# Altium PCB High-voltage.PcbDoc (part 1 of 2)
Units mil, origin at the board's own origin, x right, y up, seen from the top; angles counter-clockwise.
Board outline 11023.62 x 6692.91 mil, 2 copper layers (Top Layer, Bottom Layer); 241 components, 97 nets, 501 pads, 433 vias.
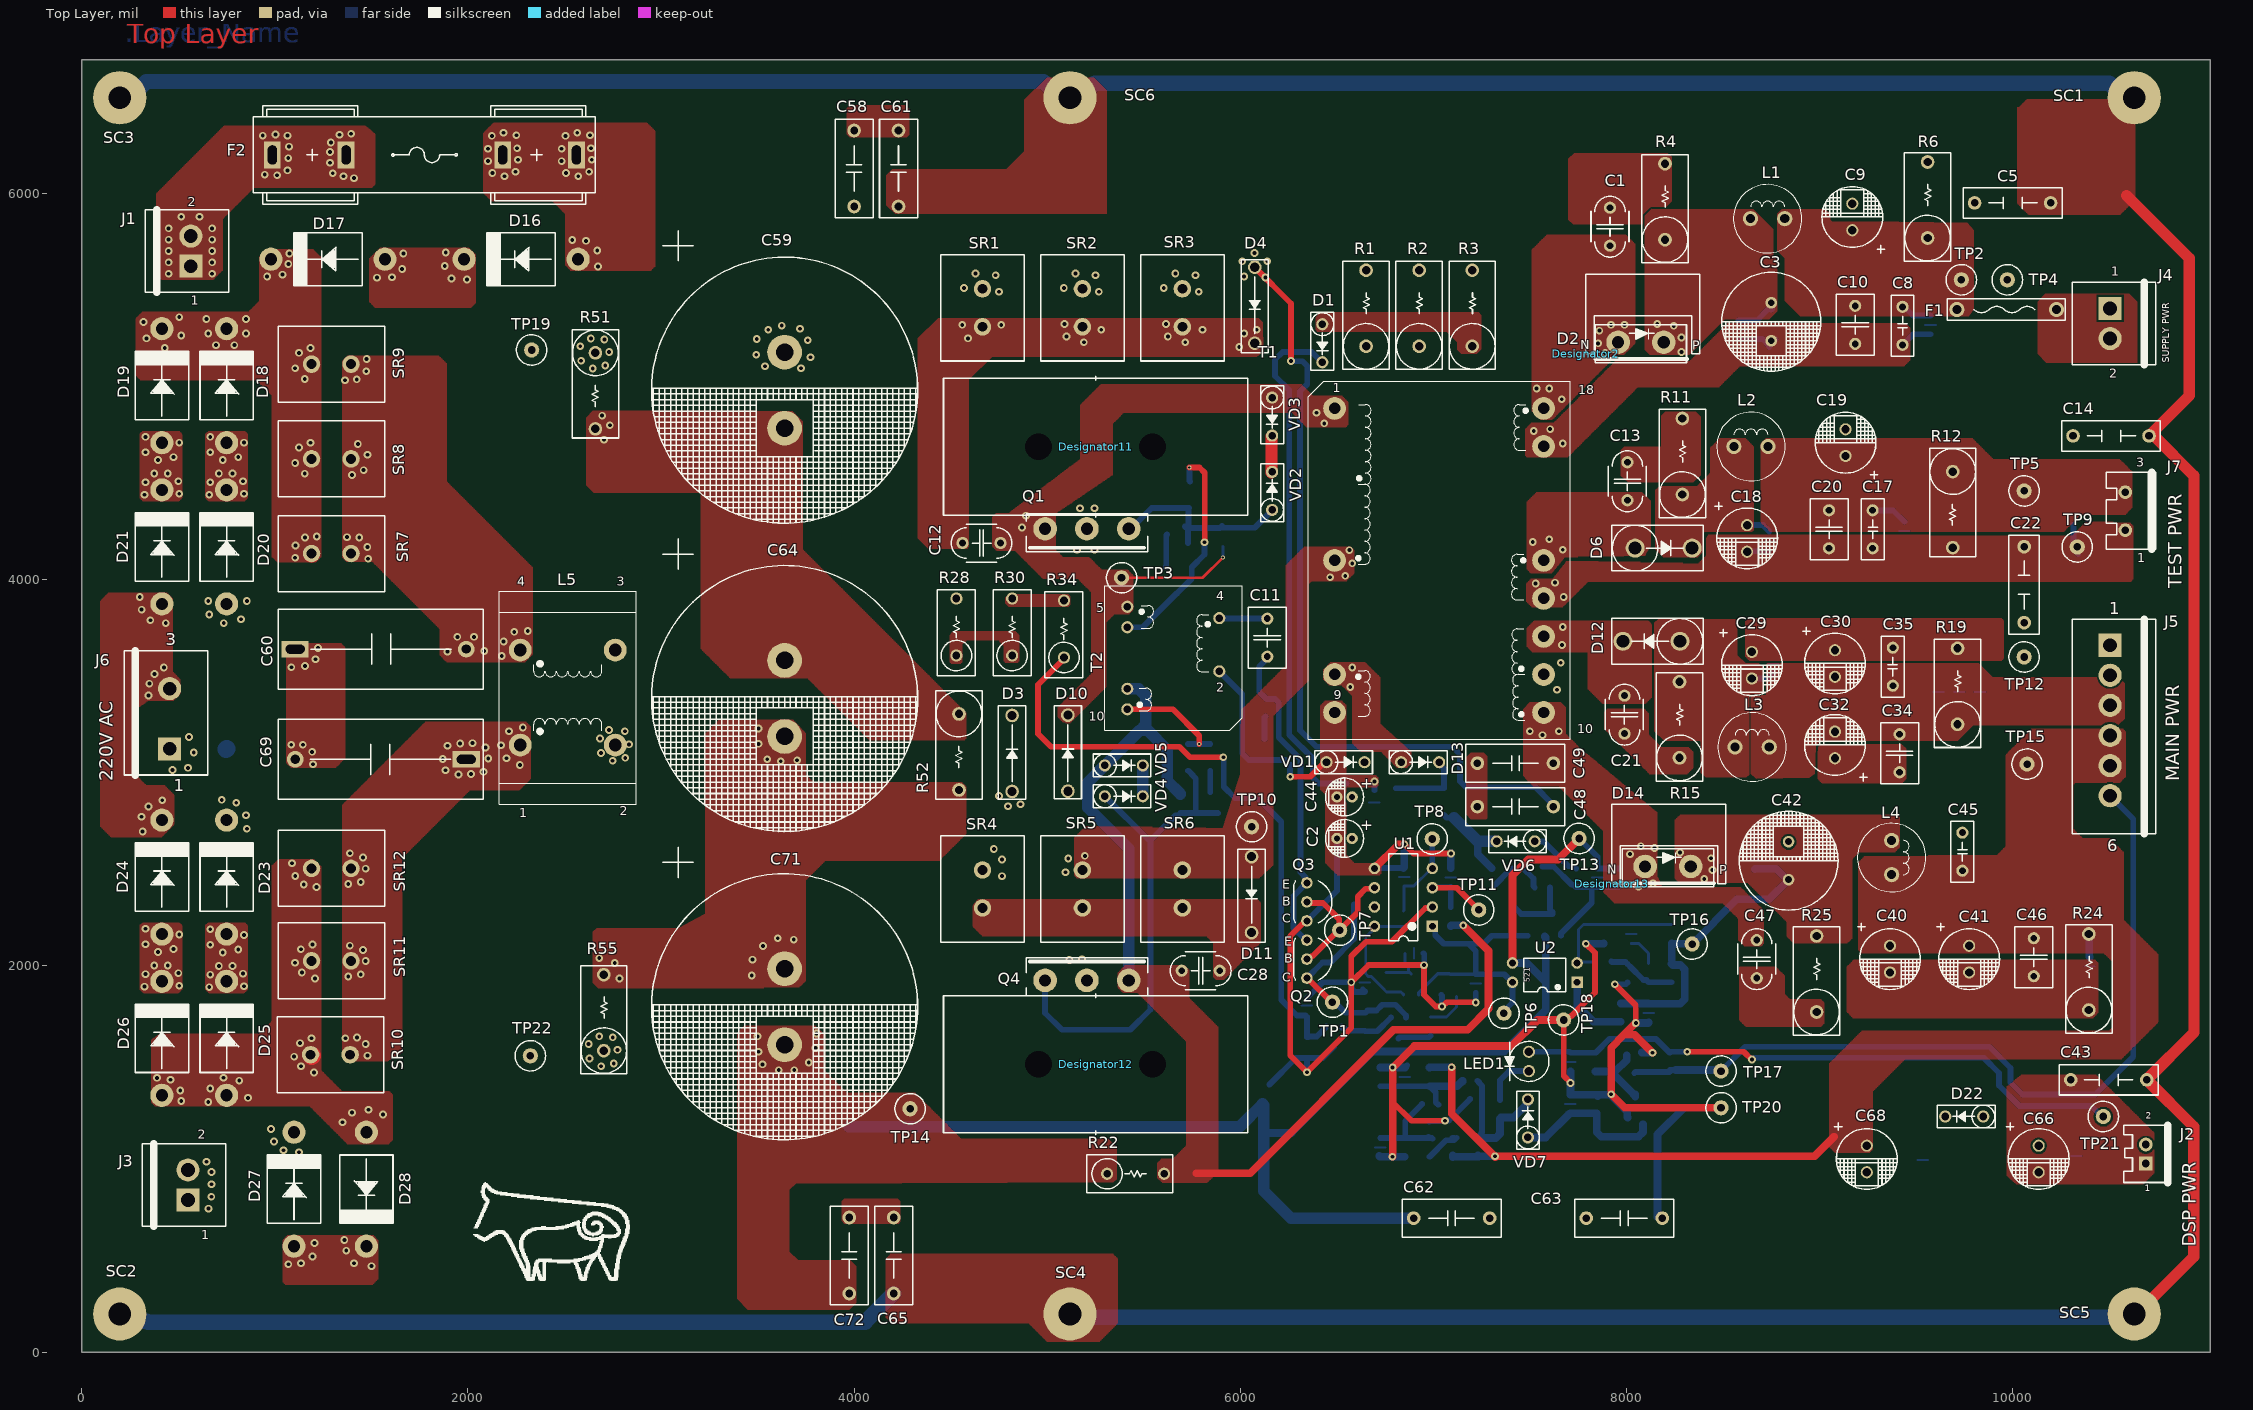
[diagram p0: Top Layer view]
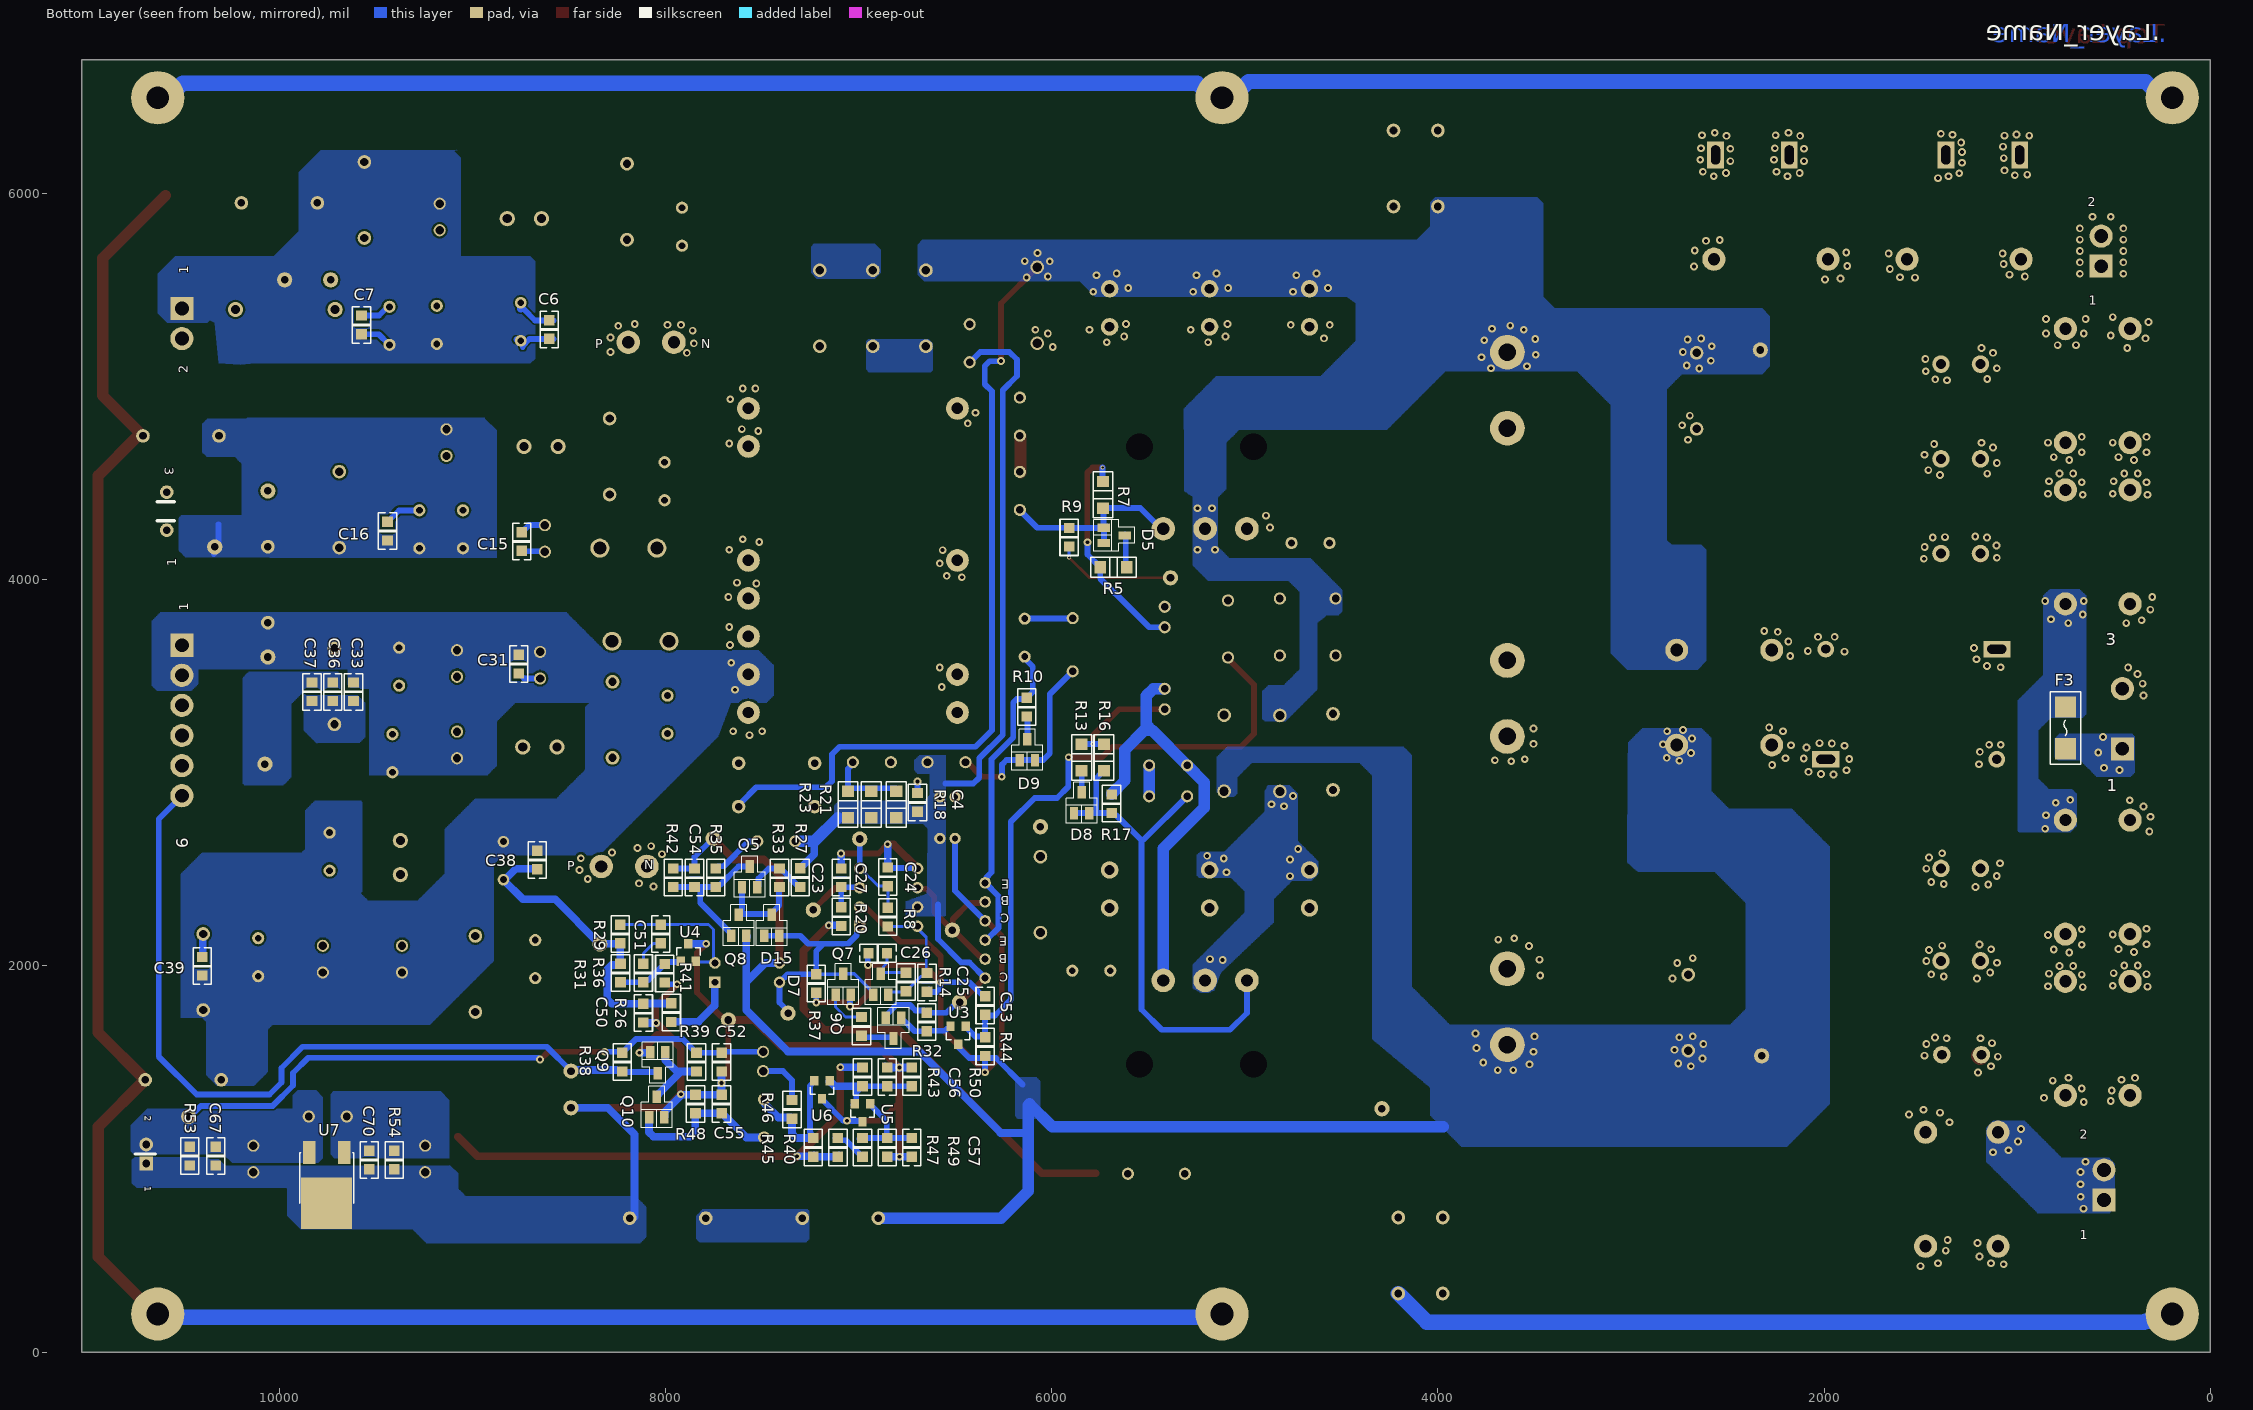
[diagram p1: Bottom Layer view, seen from below]

## Layer stack, top to bottom
Top Solder: solder mask 0.4, Solder Resist, Dk 3.5
Top Layer: signal copper 1.4
Dielectric 1: dielectric 12.6, FR-4, Dk 4.8
Bottom Layer: signal copper 1.4
Bottom Solder: solder mask 0.4, Solder Resist, Dk 3.5

## Board outline
0,0 11023.62,0 11023.62,6692.91 0,6692.91

## Design rules (kind name [scope] priority, off if disabled: settings)
Clearance [All] p1: gap=10 ignorepadtopadclearanceinfootprint=FALSE except(0: Arc-Hole Track-Hole SMDPad-Hole THPad-Hole Via-Hole Fill-Hole Poly-Hole Region-Hole Text-Hole)
PlaneConnect [All] p1: planeconnectstyle=Direct reliefexpansion=20 reliefentries=4 reliefconductorwidth=10 reliefairgap=10
PolygonConnect [All] p1: connectstyle=Direct reliefconductorwidth=10 reliefentries=4 polygonreliefangle="90 Angle" airgapwidth=10
RoutingVias [All] p1: holewidth=12 width=24 viastyle="Through Hole" minholewidth=12 minwidth=20 maxholewidth=20 maxwidth=40
SolderMaskExpansion [All] p1: expansion=4 istentingtop=FALSE
Width [All] p1: maxlimit=300 minlimit=8 preferedwidth=10
29 further rules are at their usual default settings.

## Classes and differential pairs
net class PWR: GND GND+12V GND+15V VCC+5V VCC+12V VCC+15V VCC+18V VCC-15V VDC

## Components (designator, comment, footprint, x,y, rotation, side; value= is the part's Value field where it differs from the comment)
C1 "102K/1KV" CC509*5 7915,5828.43 r90 top
C2 "47uF/25V" CE2050 6540,2660 r270 top
C3 "1000uF/35V" CE50130 8750.31,5336.18 r0 top
C4 "104/0805" C0805BSM 6695,2846.77 r270 bottom
C5 "222/250VAC(Y2)" C10013*4 10000.23,5951.8 r0 top
C6 "104/0805" C0805BSM 8602.48,5296.33 r90 bottom
C7 "104/0805" C0805BSM 9575,5320 r90 bottom
C8 "223K/63VDC" C508*3 9430,5315 r270 top
C9 "470uF/25V" CE3580 9170,5878.9 r180 top
C10 "105K63VDC" C508*5 9185,5320 r270 top
C11 "105K/63VDC" C508*5 6140,3700 r270 top
C12 "102K/1KV" CC509*5 4660,4190 r180 top
C13 "102K/1KV" CC509*5 8005,4510 r90 top
C14 "NC" C10013*4 10510,4745 r0 top
C15 "104/0805" C0805BSM 8745,4198.23 r90 bottom
C16 "104/0805" C0805BSM 9440,4251.77 r90 bottom
C17 "223K/63VDC" C508*3 9275.29,4261.22 r270 top
C18 "470uF/25V" CE3580 8625,4213.9 r0 top
C19 "470uF/25V" CE3580 9135,4710 r180 top
C20 "105K/63VDC" C508*5 9049.34,4261.22 r270 top
C21 "102K/1KV" CC509*5 7990,3301.2 r270 top
C22 "NC" C10013*4 10060,3974.48 r270 top
C23 "104/0805" C0805BSM 7219.39,1908.88 r90 bottom
C24 "222/0805" C0805BSM 6848.98,2461.11 r90 bottom
C25 "104/0805" C0805BSM 6645.78,1914.88 r90 bottom
C26 "225/0805" C0805BSM 6900.89,2065 r180 bottom
C27 "471/0805" C0805BSM 7090,2456.77 r90 bottom
C28 "102K/1KV" CC509*5 5795,1975 r0 top
C29 "470uF/25V" CE3580 8650,3557.3 r0 top
C30 "470uF/25V" CE3580 9080,3566.2 r0 top
C31 "104/0805" C0805BSM 8760,3562.97 r270 bottom
C32 "470uF/25V" CE3580 9080,3144.43 r180 top
C33 "104/0805" C0805BSM 9616.39,3419.63 r270 bottom
C34 "105K/63VDC" C508*5 9415,3101.2 r270 top
C35 "223K/63VDC" C508*3 9380,3549.63 r90 top
C36 "105/0805" C0805BSM 9723.89,3419.63 r270 bottom
C37 "105/0805" C0805BSM 9831.39,3419.63 r270 bottom
C38 "104/0805" C0805BSM 8665,2548.23 r90 bottom
C39 "104/0805" C0805BSM 10400,1998.23 r270 bottom
C40 "470uF/25V" CE3580 9365,2035 r0 top
C41 "470uF/25V" CE3580 9775,2035 r0 top
C42 "1000uF/35V" CE50130 8840,2545 r180 top
C43 "222/250VAC(Y2)" C10013*4 10498.15,1410 r180 top
C44 "47uF/25V" CE2050 6540,2875 r270 top
C45 "223K/63VDC" C508*3 9740,2591.57 r270 top
C46 "105K/63VDC" C508*5 10110,2045 r90 top
C47 "102K/1KV" CC509*5 8675,2035 r270 top
C48 "472M/400VAC(Y1)" C10013*5 7425,2825 r180 top
C49 "472M/400VAC(Y1)" C10013*5 7425,3050 r0 top
C50 "104/0805" C0805BSM 8115,1755 r90 bottom
C51 "225/0805" C0805BSM 8025,2165 r90 bottom
C52 "104/0805" C0805BSM 7710,1501.77 r270 bottom
C53 "104/0805" C0805BSM 6345,1795 r270 bottom
C54 "104/0805" C0805BSM 7850,2456.77 r270 bottom
C55 "104/0805" C0805BSM 7710,1284.8 r270 bottom
C56 "104/0805" C0805BSM 6852.5,1425 r270 bottom
C57 "104/0805" C0805BSM 6725,1060 r90 bottom
C58 "472M/400VAC(Y1)" C10013*5 4000,6130 r90 top
C59 "470uF/450V" CE100350 3640,4981.85 r0 top
C60 "0.47uF/330V~(X1)" C22527*9 1548.27,3640.5 r180 top
C61 "472M/400VAC(Y1)" C10013*5 4230,6130 r270 top
C62 "472M/400VAC(Y1)" C10013*5 7095,693.43 r0 top
C63 "472M/400VAC(Y1)" C10013*5 7988.88,693.43 r0 top
C64 "470uF/450V" CE100350 3640,3385 r0 top
C65 "472M/400VAC(Y1)" C10013*5 4205,500 r90 top
C66 "470uF/25V" CE3580 10135,1000 r0 top
C67 "104/0805" C0805BSM 10330,1015 r90 bottom
C68 "470uF/25V" CE3580 9245,1000 r0 top
C69 "0.47uF/330V~(X1)" C22527*9 1548.27,3070 r0 top
C70 "104/0805" C0805BSM 9535,995 r90 bottom
C71 "470uF/450V" CE100350 3640,1788.15 r0 top
C72 "472M/400VAC(Y1)" C10013*5 3975,500 r270 top
D1 "MUR2100E" D41P2H-1 6425,5215 r90 top
D2 "APT15D60BG" D247P2 8075,5230 r180 top
D3 "SF1600" D4236P2 4818.46,3297.13 r270 top
D4 "MUR2100E" D4236P2 6075,5225 r90 top
D5 "BAV70LT1G" TRNPNBSM 5675.87,4229.37 r0 bottom
D6 "MUR460" D27P2H-1 8192.65,4163.8 r180 top
D7 "BAT54S" TRNPNBSM 6885.63,1904.13 r270 bottom
D8 "BAV70LT1G" TRNPNBSM 5845,2845 r270 bottom
D9 "BAV70LT1G" TRNPNBSM 6126.26,3120 r270 bottom
D10 "SF1600" D4236P2 5106.93,3298.46 r270 top
D11 "MUR2100E" D4236P2 6058.58,2172.05 r90 top
D12 "MUR460" D27P2H-1 8129.65,3681.2 r0 top
D13 "MUR2100E" D41P2H-1 6941.42,3055 r180 top
D14 "APT15D60BG" D247P2 8215,2515 r180 top
D15 "BAV70LT1G" TRNPNBSM 7450,2210 r270 bottom
D16 "MUR4100E" D150 2275,5660 r0 top
D17 "MUR4100E" D150 1275,5660 r0 top
D18 "MUR4100E" D150 750,5005 r270 top
D19 "MUR4100E" D150 415,5005 r270 top
D20 "MUR4100E" D150 750,4170 r270 top
D21 "MUR4100E" D150 415,4170 r270 top
D22 "MUR2100E" D41P2H-1 9740,1220 r0 top
D23 "MUR4100E" D150 750,2460 r270 top
D24 "MUR4100E" D150 415,2460 r270 top
D25 "MUR4100E" D150 750,1625 r270 top
D26 "MUR4100E" D150 415,1625 r270 top
D27 "MUR4100E" D150 1099.06,843.37 r270 top
D28 "MUR4100E" D150 1474.06,843.37 r90 top
Designator2 "Comment" HS15*10.5 7790,5170 r0 top
Designator11 "Comment" HS18*40 5250.39,4688.98 r0 top
Designator12 "Comment" HS18*40 5250.39,1490.87 r180 top
Designator13 "Comment" HS15*10.5 7925,2425 r0 top
F1 "3A125V" "Fuse 3A 125V" 9711.31,5399.31 r0 top
F2 "=Value" F3A1000VP4 1774.49,6200 r180 top
F3 "6A/250Vac" FUSE5A350VAC 750,3124.09 r90 bottom
J1 "CON2/3.96" SIP-B1P2H 565,5624.09 r90 top
J2 "CON2/2.54" SIP-B1P2 10690,976.57 r90 top
J3 "CON2/3.96" SIP-B1P2H 550,787.05 r90 top
J4 "CON2/3.96" SIP-B1P2H 10505,5405 r270 top
J5 "CON6/3.96" SIP-B1P6H 10505,3660.91 r270 top
J6 "CON3/3.96" SIP-B1P3H 455,3124.09 r90 top
J7 "CON3/2.54" SIP-C3P3H 10583.74,4256.57 r90 top
L1 "DR2W-9*12  33uH" L9P2 8731.42,5870 r0 top
L2 "DR2W-9*12  33uH" L9P2 8645,4690 r0 top
L3 "DR2W-9*12  33uH" L9P2 8651.06,3133.6 r0 top
L4 "DR2W-9*12  33uH" L9P2 9373.86,2561.1 r270 top
L5 "T22*4" L28*17.5P4 2516.97,3389.36 r90 top
LED1 "发光二极管Φ5 发绿光" LED25C 7495,1505 r0 top
Q1 "2SK2613" 2SK2613 5205.66,4263.98 r180 top
Q2 "2N4401" 2N4401 6345,2035 r0 top
Q3 "2N4403" 2N4403 6345,2331.58 r0 top
Q4 "2SK2613" 2SK2613 5205.66,1925 r0 top
Q5 "MMBT2907ALT1" TRPNPBSM 7564.74,2460.67 r270 bottom
Q6 "NC" TRPNPBSM 6819.7,1678.05 r90 bottom
Q7 "NC" TRNPNBSM 7080,1904.13 r270 bottom
Q8 "MMBT2222ALT1G" TRNPNBSM 7621.08,2210.61 r270 bottom
Q9 "MMBT2222ALT1G" TRNPNBSM 8040.84,1498.97 r90 bottom
Q10 "MMBT2222ALT1G" TRNPNBSM 8045.63,1269.13 r270 bottom
R1 "100K/3W" R100060 6651.62,5602.83 r270 top
R2 "100K/3W" R100060 6926.62,5602.83 r270 top
R3 "100K/3W" R100060 7201.62,5602.83 r270 top
R4 "33/3W" R100060 8200,6155 r270 top
R5 "75/1206" R1206NSM 5680,4065 r180 bottom
R6 "1K/3W" R100060 9560,6163.7 r270 top
R7 "75/1206" R1206NSM 5735,4440 r270 bottom
R8 "6.81K/0805" R0805BSM 6848.98,2252.57 r90 bottom
R9 "49.9K/0805" R0805BSM 5910,4220 r270 bottom
R10 "1K/0805" R0805BSM 6130,3340 r270 bottom
R11 "33/3W" R100060 8290,4835 r270 top
R12 "1K/3W" R100060 9690,4166.3 r90 top
R13 "75/1206" R1206NSM 5845,3080 r270 bottom
R14 "1M/0805" R0805BSM 6755,1916.77 r270 bottom
R15 "33/3W" R100060 8275,3471.2 r270 top
R16 "75/1206" R1206NSM 5730,3080 r270 bottom
R17 "49.9K/0805" R0805BSM 5690,2840 r90 bottom
R18 "49.9/1206" R1206NSM 6805,2836.1 r90 bottom
R19 "1K/3W" R100060 9715,3644.9 r270 top
R20 "330/0805" R0805BSM 7090,2255 r270 bottom
R21 "249/1206" R1206NSM 6935,2836.1 r90 bottom
R22 "0.33/3W" R075005 5457.95,923.43 r180 top
R23 "75/1206" R1206NSM 7055,2836.1 r90 bottom
R24 "1K/3W" R100060 10395,2165 r270 top
R25 "33/3W" R100060 8985,2155 r270 top
R26 "3.3K/0805" R0805BSM 7970,1758.23 r270 bottom
R27 "5.6K/0805" R0805BSM 7302.98,2457.42 r90 bottom
R28 "2M/1W" R075005 4530,3755 r270 top
R29 "3.3K/0805" R0805BSM 8235,2165 r90 bottom
R30 "2M/1W" R075005 4818.47,3755 r270 top
R31 "4.99K/0805" R0805BSM 8233.33,1963.23 r270 bottom
R32 "NC" R0805BSM 6647.35,1709.49 r270 bottom
R33 "5.6K/0805" R0805BSM 7410,2456.77 r270 bottom
R34 "400K/1W" R075005 5086.93,3745 r270 top
R35 "5.6K/0805" R0805BSM 7740,2456.77 r270 bottom
R36 "10K/0805" R0805BSM 8115,1963.23 r90 bottom
R37 "NC" R0805BSM 6985,1686.77 r90 bottom
R38 "3K/0805" R0805BSM 8225,1501.77 r270 bottom
R39 "3K/0805" R0805BSM 7840,1501.77 r270 bottom
R40 "9.1K/0805" R0805BSM 7107.5,1060 r90 bottom
R41 "1K/0805" R0805BSM 8005,1961.77 r270 bottom
R42 "5.6K/0805" R0805BSM 7960,2456.77 r90 bottom
R43 "8.25K/0805" R0805BSM 6980,1425 r270 bottom
R44 "10K/0805" R0805BSM 6345,1581.77 r270 bottom
R45 "2K/0805" R0805BSM 7235,1060 r90 bottom
R46 "2K/0805" R0805BSM 7345,1256.77 r270 bottom
R47 "2K/0805" R0805BSM 6980,1060 r90 bottom
R48 "5.6K/0805" R0805BSM 7845,1284.8 r90 bottom
R49 "2K/0805" R0805BSM 6852.5,1060 r270 bottom
R50 "2.49K/0805" R0805BSM 6725,1425 r90 bottom
R51 "140K/3W" R100060 2660,4781.3 r90 top
R52 "140K/3W" R100060 4543.35,2911.3 r90 top
R53 "3.3K/0805" R0805BSM 10465,1015 r270 bottom
R54 "3.3K/0805" R0805BSM 9405,995 r270 bottom
R55 "140K/3W" R100060 2703.54,1954.59 r270 top
SC1 "" SC40#1 10244.86,6260 r0 top locked
SC2 "" SC40#2 246.5,255 r0 top locked
SC3 "" SC40#3 141.5,6350 r0 top locked
SC4 "" SC40#4 4839.86,445 r0 top locked
SC5 "" SC40#5 10099.86,200 r0 top locked
SC6 "" SC40#6 4914.86,6205 r0 top locked
SR1 "500/10W" SRSQM1411 4665,5310 r90 top
SR2 "500/10W" SRSQM1411 5182.5,5310 r90 top
SR3 "500/10W" SRSQM1411 5700,5310 r90 top
SR4 "500/10W" SRSQM1411 4665,2300 r90 top
SR5 "500/10W" SRSQM1411 5182.5,2300 r90 top
SR6 "500/10W" SRSQM1411 5700,2300 r90 top
SR7 "30/10W" SRSQM130100 1190,4135.61 r0 top
SR8 "30/10W" SRSQM130100 1190,4626.05 r0 top
SR9 "30/10W" SRSQM130100 1190,5116.5 r0 top
SR10 "30/10W" SRSQM130100 1185.28,1540 r0 top
SR11 "30/10W" SRSQM130100 1190,2026.27 r0 top
SR12 "30/10W" SRSQM130100 1190,2505 r0 top
T1 "ER42" ER42 7030,4100 r0 top
T2 "EEL-16X" EEL-16X 5653.19,3594.45 r180 top
TP1 "VCC+18V" TEST 6477.24,1812.08 r0 top
TP2 "MON+15V" TEST 9734.5,5553.34 r0 top
TP3 "MOS_UP_S" TEST 5385,4010 r0 top
TP4 "MONGND" TEST 9972.77,5553.34 r0 top
TP5 "VCC+12V" TEST 10060,4460 r0 top
TP6 "CMP" TEST 7365.55,1755 r90 top
TP7 "PWM_OUT" TEST 6515,2185 r90 top
TP8 "OSC" TEST 6994.48,2657.33 r90 top
TP9 "GND+12V" TEST 10335,4170 r0 top
TP10 "MOS_DOWN_D" TEST 6058.58,2720.8 r90 top
TP11 "CS" TEST 7235,2290 r90 top
TP12 "GND+15V" TEST 10060,3600 r0 top
TP13 "GND" TEST 7755,2660 r90 top
TP14 "GND" TEST 4290,1260 r0 top
TP15 "VCC+15V" TEST 10075,3045 r0 top
TP16 "Vfb" TEST 8340.28,2112.87 r180 top
TP17 "PWR_NG" TEST 8490,1455 r0 top
TP18 "GND+15V" TEST 7675,1720 r180 top
TP19 "VDC" TEST 2330,5190 r0 top
TP20 "GND+15V" TEST 8490,1265 r0 top
TP21 "VCC+5V" TEST 10470,1220 r0 top
TP22 "GND" TEST 2323.08,1534.18 r0 top
U1 "UC2844BN" 2844 6995,2205 r90 top
U2 "TLP521" PH521 7744.65,1915 r90 top
U3 "NC" AZ431LS23TSM 6485,1640 r180 bottom
U4 "AZ431LANTR-E1" AZ431LS23TSM 7882.24,2069.59 r0 bottom
U5 "AZ431LANTR-E1" AZ431LS23TSM 6980,1240 r180 bottom
U6 "AZ431LANTR-E1" AZ431LS23TSM 7190,1358.44 r180 bottom
U7 "MC7805BDTG" 7805SM 9755,865 r270 bottom
VD1 "1N4749" D41P2H-1 6555,3055 r180 top
VD2 "1N4746" D41P2H-1 6165,4470 r270 top
VD3 "1N4746" D41P2H-1 6165,4835 r90 top
VD4 "1N4746" D41P2H-1 5406.99,2878.35 r180 top
VD5 "1N4746" D41P2H-1 5406.99,3038.35 r180 top
VD6 "1N4747" D41P2H-1 7416.73,2645 r0 top
VD7 "1N4746" D41P2H-1 7490,1220 r270 top

## Footprints (in the part's own frame and the unit in brackets; to place one, negate y for a bottom-side part, rotate by r counter-clockwise, add the part's x,y. Pads: shape width x height; smd on the part's side, far side on the other; paste and mask are expansions set on the pad)
2N4401 [mil]
  round 60 hole 35.43: 1(0,-98.42) 2(0,0) 3(0,98.43)
  silkscreen extent -69,-108 130,108, body extent -69,-108 128,110, height 308
2N4403 [mil]
  round 60 hole 35.43: 1(0,-98.42) 2(0,0) 3(0,98.43)
  silkscreen extent -69,-108 130,108, body extent -69,-108 128,110, height 308
2SK2613 [mm]
  round 3.1 hole 1.6: 1(-5.5,0) 2(0,0) 3(5.5,0)
  silkscreen extent -8,-2 8,3, body extent -8.1,-2.1 8.1,3.1, height 38.68
2844 [mil]
  rect 60x60 hole 35.43: 1(0,0)
  round 60 hole 35.43: 2(100,0) 3(200,0) 4(300,0) 5(300,300) 6(200,300) 7(100,300) 8(0,300)
  silkscreen extent -75,75 375,225, body extent -79,-34 379,334, height 200
7805SM [mm]
  rect 3x1.62 smd: 1(-4.265,2.285) 3(-4.265,-2.285)
  rect 6.75x6.71 smd: 2(2.39,0)
  silkscreen extent -4.27,-3.55 2.38,3.55
AZ431LS23TSM [mm]
  rect 1.1x1.25 smd: 1(1,1.175) 2(-1,1.175) 3(0,-1.175)
  silkscreen extent -1.55,-0.6 1.55,0.35, body extent -1.55,-0.65 1.55,0.55, height 1.12
C508*3 [mm]
  round 1.6 hole 0.9: 1(-2.5,0) 2(2.5,0)
  silkscreen extent -4,-1.5 4,1.5, body extent -4,-1.5 4,1.5, height 9
C508*5 [mm]
  round 1.6 hole 0.9: 1(-2.5,0) 2(2.5,0)
  silkscreen extent -4,-2.5 4,2.5, body extent -4,-2.5 4,2.5, height 9
C0805BSM [mm]
  rect 1.35x1.4 smd: 1(-1.225,0) 2(1.225,0)
  Top Layer lines w0.254: 0,0.7 0,-0.7
  silkscreen extent -2.4,-1.2 2.4,1.2, body extent -2,-0.83 2,0.83, height 1.27
C10013*4 [mm]
  round 1.8 hole 1: 1(-5,0) 2(5,0)
  silkscreen extent -6.5,-2 6.5,2, body extent -6.6,-2.1 6.6,2.1, height 9
C10013*5 [mm]
  round 1.8 hole 1: 1(-5,0) 2(5,0)
  silkscreen extent -6.5,-2.5 6.5,2.5, body extent -6.6,-2.6 6.6,2.6, height 33.5
C22527*9 [mm]
  round 2.2 hole 1.2: 1(-11.25,0)
  rect 3.56x2.2 hole 1.2 slot 2.5 at 0 deg: 2(11.25,0)
  silkscreen extent -13.5,-5.25 13.5,5.25, body extent -13.5,-5.25 13.5,5.25, height 15
CC509*5 [mm]
  round 1.6 hole 0.9: 1(-2.5,0) 2(2.5,0)
  silkscreen extent -4,-2.5 4,2.5, body extent -4.45,-2.5 4.51,2.55, height 9
CE2050 [mm]
  round 1.5 hole 0.8: 1(0,1) 2(0,-1)
  silkscreen extent -2.5,-2.5 2.5,2.5, body extent -2.5,-2.5 2.5,2.5, height 11
CE3580 [mm]
  round 1.6 hole 1.1: 1(0,1.75) 2(0,-1.75)
  silkscreen extent -4.25,-4 4,4.75, body extent -3.98,-4 3.99,3.98, height 20
CE50130 [mil]
  round 60 hole 35.43: 1(0,98.43) 2(0,-98.42)
  silkscreen extent -256,-256 256,256, body extent -256,-256 256,256, height 1673
CE100350 [mil]
  round 180 hole 90.55: 1(0,196.85) 2(0,-196.85)
  silkscreen extent -689,-689 689,827, body extent -690,-693 694,691, height 2402
D27P2H-1 [mm]
  round 2.5 hole 1.7: 1(-3.75,0) 2(3.75,0)
  silkscreen extent -5.2,-3 6.8,3, body extent -5.2,-3 6.8,3, height 14.1
D41P2H-1 [mm]
  round 1.6 hole 1: 1(-2.25,0) 2(2.75,0)
  silkscreen extent -3.3,-1.5 4.3,1.5, body extent -3.3,-1.5 4.3,1.5, height 14.1
D150 [mil]
  round 120 hole 62.99: 1(295.28,0) 2(-295.28,0)
  silkscreen extent -177,-138 177,138, body extent -181,-142 181,142, height 367
D247P2 [mm]
  round 3.1 hole 1.6: 1(-3,0) 2(3,0)
  silkscreen extent -6.05,-2.3 6,2.7, body extent -8.4,-2.4 8.4,2.8, height 38.68
D4236P2 [mm]
  round 1.8 hole 1.2: 1(0,0) 2(10,0)
  silkscreen extent -1.25,-1.8 11,1.8, body extent -1.25,-1.8 11,1.8, height 14.1
EEL-16X [mm]
  round 1.6 hole 1: 2(-6.05,1.75) 4(-6.05,-5.25) 5(6.05,-6.75) 6(6.05,-4.05) 9(6.05,4.05) 10(6.05,6.75)
  silkscreen extent -9,-9.5 9,9.5
ER42 [mm]
  round 3 hole 1.5: 1(-13.75,20) 5(-13.75,0) 8(-13.75,-15) 9(-13.75,-20) 10(13.75,-20) 11(13.75,-15) 12(13.75,-10) 13(13.75,-5) 14(13.75,0) 17(13.75,15) 18(13.75,20)
  silkscreen extent -17.25,-23.5 17.25,23.55
F3A1000VP4 [mm]
  rect 2.2x3.5 hole 1.2 slot 2.5 at 90 deg: 1(20,0) 2(10.3,0) 3(-10.3,0) 4(-20,0)
  silkscreen extent -22.5,-6.5 22.5,6.5, body extent -22.5,-5 22.5,5, height 14
FUSE5A350VAC [mm]
  rect 2.8x2.8 smd: 1(0,0) 2(5.5,0)
  silkscreen extent -2,-2 7.5,2
"Fuse 3A 125V" [mm]
  round 2 hole 1.2: 1(0,0) 2(13.11,0)
  silkscreen extent -1.25,-1.4 14.25,1.4
HS15*10.5 [mil]
  silkscreen extent 0,0 591,413
HS18*40 [mm]
  round 0 hole 3.5: 1(-7.5,0) 2(7.5,0)
  silkscreen extent -20,-9.25 20,9.25
L9P2 [mm]
  round 2 hole 1.2: 1(-2.25,0) 2(2.25,0)
  silkscreen extent -4.5,-4.5 4.5,4.5
L28*17.5P4 [mm]
  round 3 hole 1.7: 1(-6.25,6.25) 2(-6.25,-6.25) 3(6.25,-6.25) 4(6.25,6.25)
  silkscreen extent -14,-9 14,9
LED25C [mm]
  round 1.6 hole 1.1: 1(0,-1.27) 2(0,1.27)
  silkscreen extent -3.17,-2.64 2.64,2.64
PH521 [mil]
  rect 60x60 hole 35.43: 1(0,0)
  round 60 hole 35.43: 2(100,0) 3(100,334.65) 4(0,334.65)
  silkscreen extent -50,59 125,276, body extent -54,-34 134,334, height 175
R0805BSM [mm]
  rect 1.35x1.4 smd: 1(-1.225,0) 2(1.225,0)
  silkscreen extent -2.4,-1.2 2.4,1.2, body extent -2,-0.83 2,0.83, height 0.5
R1206NSM [mm]
  rect 1.5x1.6 smd: 1(-1.75,0) 2(1.75,0)
  silkscreen extent -3,-1.3 3,1.3, body extent -2.6,-0.9 2.6,0.9, height 0.6
R075005 [mm]
  round 1.6 hole 1: 1(-3.75,0) 2(3.75,0)
  silkscreen extent -4.9,-2.5 6.4,2.5, body extent -4.91,-2.5 6.41,2.5, height 16
R100060 [mm]
  round 1.8 hole 1.1: 1(0,0) 2(10,0)
  silkscreen extent -1.2,-3.05 13.05,3.05, body extent -1.21,-3.05 13.06,3.05, height 16
SC40#1 [mm]
  round 7 hole 3: 1(9.78,5.996)
SC40#2 [mm]
  round 7 hole 3: 1(-1.261,-1.477)
SC40#3 [mm]
  round 7 hole 3: 1(1.406,3.71)
SC40#4 [mm]
  round 7 hole 3: 1(7.067,-6.303)
SC40#5 [mm]
  round 7 hole 3: 1(13.463,-0.08)
SC40#6 [mm]
  round 7 hole 3: 1(5.162,7.393)
SIP-B1P2 [mm]
  rect 1.8x1.8 hole 1: 1(0,0)
  round 1.8 hole 1: 2(2.5,0)
  silkscreen extent -2.5,-2.88 5,2.88, body extent -2.5,-2.75 5,2.75, height 10
SIP-B1P2H [mil]
  rect 120x120 hole 70.87: 1(0,0)
  round 120 hole 70.87: 2(155.91,0)
  silkscreen extent -135,-197 291,236
SIP-B1P3H [mil]
  rect 120x120 hole 70.87: 1(0,0)
  round 0 all layers, no hole: 2(155.91,0)
  round 120 hole 70.87: 3(311.81,0)
  silkscreen extent -135,-197 509,236
SIP-B1P6H [mil]
  rect 120x120 hole 70.87: 1(0,0)
  round 120 hole 70.87: 2(155.91,0) 3(311.81,0) 4(467.72,0) 5(623.62,0) 6(779.53,0)
  silkscreen extent -135,-197 976,236
SIP-C3P3H [mm]
  round 1.8 hole 1: 1(0,0) 3(5,0)
  round 0 all layers, no hole: 2(2.5,0)
  silkscreen extent -2.51,-4 7.6,2.5, body extent -2.5,-4.1 7.6,2.53, height 7
SRSQM1411 [mm]
  round 2.3 hole 1.3: 1(0,0) 2(5,0)
  silkscreen extent -4.5,-5.5 9.5,5.5, body extent -4.5,-5.5 9.5,5.5, height 51
SRSQM130100 [mm]
  round 2.3 hole 1.3: 1(0,0) 2(5.2,0)
  silkscreen extent -4.4,-5 9.6,5, body extent -4.5,-5 9.9,5, height 40
TEST [mm]
  round 2 hole 1: 1(0,0)
  silkscreen extent -2,-2 2,2
TRNPNBSM [mm]
  rect 1.65x1.1 smd: 1(1.375,-1) 2(1.375,1) 3(-1.375,0)
  silkscreen extent -2.7,-2.05 2.7,2.05, body extent -2.7,-2.05 2.7,2.05, height 1.3
TRPNPBSM [mm]
  rect 1.65x1.1 smd: 1(1.375,-1) 2(1.375,1) 3(-1.375,0)
  silkscreen extent -2.7,-2.05 2.7,2.05, body extent -2.7,-2.05 2.7,2.05, height 1.14

## Part data
C1 C12 C13 C21 C28 C47: library part CC509*5, "CC509*5"
C2 C44: library part CE2050, "CE2050"
C3 C42: library part CE50130, "CE50130"
C4 C6 C7 C15 C16 C23 C24 C25 C26 C27 C31 C33 C36 C37 C38 C39 C50 C51 C52 C53 C54 C55 C56 C57 C67 C70: library part C0805BSM, "C0805BSM"
C5 C14 C22 C43: library part C10013*4, "C10013*4"
C8 C17 C35 C45: library part C508*3, "C508*3"
C9 C18 C19 C29 C30 C32 C40 C41 C66 C68: library part CE3580, "CE3580"
C10 C11 C20 C34 C46: library part C508*5, "C508*5"
C48 C49 C58 C61 C62 C63 C65 C72: library part C10013*5, "C10013*5"
C59 C64 C71: library part CE100350, "CE100350"
C60 C69: library part C22527*9, "C22527*9"
D1 D11 D13 D22 VD1 VD2 VD3 VD4 VD5 VD6 VD7: library part D41P2H-1, "D41P2H-1"
D2 D14: library part D247P2, "D247P2"
D3 D4 D10: library part D4236P2, "D4236P2"
D6 D12: library part D27P2H-1, "D27P2H-1"
D7: library part MMBD4148SE
D16 D17 D18 D19 D20 D21 D23 D24 D25 D26 D27 D28: library part D150, "D150"
F1 F3: library part FUSE, "FUSE"
F2: library part F3A1000VP4, "F3A1000VP4"
J1 J2 J3 J4: library part CN25P02, "CN25P02"
J5: library part SIP-B1P6H, "SIP-B1P6H"
J6: library part SIP-B1P3H, "SIP-B1P3H"
J7: library part SIP-C3P3H, "SIP-C3P3H"
L1 L2 L3 L4: library part L9P2, "L9P2"
L5: library part L28*17.5P4, "L28*17.5P4"
LED1: library part LED25C, "LED25C"
Q1 Q4: library part 2sk2613, "2sk2613"
Q5 Q6: library part TRPNPBSM, "TRPNPBSM"
Q7 Q8 Q9 Q10: library part TRNPNBSM, "TRNPNBSM"
R1 R2 R3 R4 R6 R11 R12 R15 R19 R24 R25 R51 R52 R55: library part R100060, "R100060"
R5 R7 R13 R16 R18 R21 R23: library part R1206NSM, "R1206NSM"
R8 R9 R10 R14 R17 R20 R26 R27 R29 R31 R32 R33 R35 R36 R37 R38 R39 R40 R41 R42 R43 R44 R45 R46 R47 R48 R49 R50 R53 R54: library part R0805BSM, "R0805BSM"
R22 R28 R30 R34: library part R075005, "R075005"
SC1 SC2 SC3 SC4 SC5 SC6: library part SC40, "SC40", PDIF_TY=255
SR1 SR2 SR3 SR4 SR5 SR6 SR7 SR8 SR9 SR10 SR11 SR12: library part SRSQM200100, "SRSQM200100"
TP1 TP2 TP3 TP4 TP5 TP6 TP7 TP8 TP9 TP10 TP11 TP12 TP13 TP14 TP15 TP16 TP17 TP18 TP19 TP20 TP21 TP22: library part TEST, "TEST"
U2: library part PH521, "PH521"
U3 U4 U5 U6: library part AZ431LS23TSM
U7: library part 7805SM, "7805SM"

## Via types
v1: diameter 40, hole 20, Top Layer to Bottom Layer, tented both sides, 426 vias
v2: diameter 40, hole 20, Top Layer to Bottom Layer, 3 vias
v3: diameter 22, hole 12, Top Layer to Bottom Layer, 2 vias
v4: diameter 22, hole 12, Top Layer to Bottom Layer, tented both sides, 1 vias
v5: diameter 40, hole 22, Top Layer to Bottom Layer, 1 vias

## Nets (pads, with @x,y where several pads share a name; then routed paths per layer and width w, separated by ;. In a path a pad name is that pad's centre, name@x,y a point inside that pad or via, vN(x,y) a via of type N, cw(c..) or ccw(c..) an arc to the next point about the centre after c; other vN are vias at no path point)
GND: C2.2 C4.1 C23.1 C24.2 C25.1 C26.1 C27.2 C44.2 C53.1 C54.1 C62.1 C71.2 C72.2 D9.1 D9.2 D10.2 L5.2 Q3.1 Q7.2 Q8.2 R22.2 R42.2 R44.2 R55.2 T1.9 T2.2 TP13.1 TP14.1 TP22.1 U1.2 U1.5 U2.3 U3.3 VD1.2 | length 13349.6
  Top Layer w30: v1(6258.85,2979.67) 6362.47,2979.67 6442.11,3059.3 6442.11,3059.62 VD1.2@6446.73,3055 ; Q3.1@6336.88,2233.15 6321.88,2218.15 6258.93,2155.19 6258.93,1535.34 v1(6345.33,1448.93) 6575,1678.6 v5(6575,1915) ; v1(6850,2630) 6897.65,2582.35 v1(7091.33,2582.35) ; U1.2@6995,2305 6989.26,2299.26 6959.26,2299.26 6785,2125 6650.58,2125 6575,2049.42 v5(6575,1915) ; 7199.91,1811.88 7069.58,1811.88 7047.71,1790 7011.96,1790 6951.29,1850.67 v2(6951.29,2003.92) 6663.92,2003.92 v5(6575,1915)
  Top Layer w40: U1.5@6695,2505 6820,2630 v1(6850,2630) ; U2.3@7410,2015 7410,2470.25 7491.31,2551.56 7646.56,2551.56 TP13.1@7755,2660
  Bottom Layer w30: T2.2@5891.38,3525.55 6010,3406.93 6010,3100 6044.13,3065.87 D9.2@6086.89,3065.87 D9.1@6165.63,3065.87 6234.13,3065.87 6256.93,3043.07 6256.93,2981.58 v1(6258.85,2979.67) ; 6150,1385 6288.54,1523.54 R44.2@6345,1523.54 ; Q3.1@6345,2233.15 6500.63,2388.78 C2.2@6500.63,2660 ; v1(6345.33,1448.93) 6345,1448.93 R44.2@6345,1523.54 ; C53.1@6345.98,1833.23 6427.76,1915 v5(6575,1915) ; U3.3@6485,1583.74 6485,1580.79 6427.76,1523.54 R44.2@6345,1523.54 ; v5@6577.71,1915 v5(6575,1915) ; C25.1@6634.21,1878.23 C25.1@6645.78,1866.66 6644.12,1865 6594.49,1865 6576.91,1882.57 6576.91,1913.09 v5(6575,1915) ; U1.5@6695,2505 6697.17,2507.17 6837.83,2507.17 C24.2@6845,2500 ; C4.1@6695,2910 v2(6695,2955) ; C24.2@6848.98,2509.34 C24.2@6850,2510.36 ; C26.1@6949.11,2065 6952.92,2061.2 v2@6952.92,2004.26 ; Q7.2@7040.63,1850 7045,1845.63 v1@7045,1800 ; C23.1@7219.39,1860.65 7220,1860.04 v1(7220,1810) ; Q8.2@7577.7,2152.47 Q8.2@7581.71,2156.47 ; TP13.1@7755,2660 7850,2565 C54.1@7850,2505 R42.2@7960,2505
  Bottom Layer w40: 6122.21,1135 6265,1135 6687.09,1557.09 7367.09,1557.09 7581.71,1771.71 7581.71,1916.45 ; C24.2@6850,2510.36 v1(6850,2630) ; C27.2@7090,2505 7090,2581.02 v1(7091.33,2582.35) ; U2.3@7410,2015 7483.15,2015 7581.71,1916.45 ; Q8.2@7577.7,2152.47 7581.71,2148.47 7581.71,1916.45
  Bottom Layer w60: 3972.63,1167.67 5997.67,1167.67 6115,1285 6122.21,1277.79 6122.21,1135 6122.21,834.18 6262.95,693.43 C62.1@6898.15,693.43
  other v1: 3610,1460 3690,1460 2690,1480 3525,1490 2755,1495 3765,1500 2630,1520 3505,1555 2775,1565 3800,1575 2625,1595 2750,1630 2680,1635 3500,1635 3805,1650 7045,1790 2749.5,3062.4 2814.5,3077.4 2689.5,3102.4 2834.5,3147.4 2684.5,3177.4 2812.55,3215.53 2730.09,3221.27
GND+12V: C14.1 C15.1 C16.1 C17.2 C18.2 C19.2 C20.2 C22.1 J7.1 R12.1 T1.13 TP9.1 | length 281.7
  Bottom Layer w30: C18.2@8625,4145 8627.5,4147.5 8737.5,4147.5 C15.1@8740,4150 ; 10315,4287.5 10315,4158.19 TP9.1@10340,4133.19
  other v1: 7675,3910 7530,3980 7630,3985
GND+15V: C22.2 C29.1 C30.1 C31.1 C32.1 C33.1 C34.2 C35.2 C38.2 C39.2 C40.2 C41.2 C42.2 C43.2 C45.1 C46.1 C50.1 C52.2 C55.1 C56.1 C57.1 C63.2 C66.2 C67.1 C68.2 C70.1 J2.1 J5.1 J5.2 Q9.2 Q10.2 R19.1 R24.2 R41.2 R48.2 R49.2 R50.2 R53.2 R54.2 T1.11 TP12.1 TP18.1 TP20.1 U4.3 U5.3 U6.3 U7.2 | length 6185.5
  Top Layer w30: 6789.11,1295 6886.28,1197.83 v1(7059.98,1197.83) ; v1(7710,1393.29) 7710,1395.99 7675,1430.99 TP18.1@7675,1720 7688.19,1720 7707.84,1739.65 7714.66,1739.65 7837.11,1862.09 7837.11,2067.89 v1(7790,2115) ; v1(7940,1905) 8048.74,1796.26 v1(8048.74,1704.56)
  Top Layer w40: v1(6787.86,1011.77) 6789.11,1013.02 6789.11,1295 v1(6789.11,1473.23) 6900.63,1584.74 7404.38,1584.74 7539.64,1720 TP18.1@7675,1720 ; v1(8048.74,1704.56) 7987.09,1642.91 ; v1(8135,1550) 8042.09,1642.91 7987.09,1642.91 ; TP20.1@8490,1265 7990.94,1265 v1(7920.83,1335.11) 7920.83,1576.64 7987.09,1642.91
  Bottom Layer w30: C56.1@6853.23,1473.23 C56.1@6865,1485 ; U5.3@6979.36,1194.38 U5.3@6980,1193.74 6982.18,1195.92 7058.07,1195.92 v1(7059.98,1197.83) 7061.89,1199.74 7080.51,1199.74 7190,1309.23 U6.3@7190,1312.18 ; v1(7940,1905) 7996.46,1905 R41.2@8005,1913.54 R41.2@8005.96,1912.59 ; C63.2@8185.73,693.43 C63.2@8189.56,697.27 ; C68.2@9252.27,927.27 C68.2@9255,930
  Bottom Layer w40: C57.1@6720,1015 6723.23,1011.77 v1(6787.86,1011.77) R49.2@6852.5,1011.77 ; R50.2@6725,1473.23 v1(6789.11,1473.23) C56.1@6853.23,1473.23 ; C52.2@7710,1453.54 v1(7710,1393.29) C55.1@7710,1333.03 R48.2@7845,1333.03 ; v1(7790,2115) 7881.39,2115 U4.3@7882.24,2115.85 ; R48.2@7851.57,1326.46 R48.2@7845,1333.03 ; Q10.2@8006.26,1215 8004.61,1216.65 8004.61,1243.59 7920.83,1327.37 v1(7920.83,1335.11) 7918.75,1333.03 R48.2@7845,1333.03 ; v1(8048.74,1704.56) 8048.99,1704.3 8112.53,1704.3 C50.1@8115,1706.77 ; Q9.2@8080.21,1553.1 8080.21,1551.65 8081.87,1550 v1@8125,1550 ; C63.2@8160.94,699.56 8160.94,721.16 8160.94,1127.11 8298.84,1265 TP20.1@8490,1265
  other v1: 7640,3430 7660,3570
"MON GND": C3.2 C5.1 C6.1 C7.1 C8.2 C9.2 C10.2 J4.1 R6.1 T1.17 TP4.1 | length 368.7
  Bottom Layer w30: C6.1@8580,5246.77 8602.48,5246.77 8705.11,5246.77 8740,5211.88 8740,5205 ; C3.2@8750.31,5237.76 8756.05,5243.5 C3.2@8772.9,5243.5 ; C8.2@9435,5220 9435,5221.57 9485.2,5271.77 C7.1@9575,5271.77
  other v1: 7670,4705 7520,4770 7605,4780
MON+15V: F1.2 J4.2
NetC1_1: C1.1 D2.2 T1.18
  other v1: 7665,4935 7535,4990 7600,4990 7890,5175 7853.51,5224.29 7860,5290 7920,5320 7990,5320
NetC1_2: C1.2 R4.1
NetC3_1: C3.1 C6.2 D2.1 L1.1 R4.2 | length 203.2
  Bottom Layer w30: C6.2@8580,5343.23 8602.48,5343.23 8676.38,5343.23 8735.2,5402.05 8747.95,5402.05 8750,5400 ; 8754.8,5402.05 8754.8,5409.8 C3.1@8755,5410
  other v1: 8285,5180 8285,5255 8245,5315 8160,5325
NetC7_2: C7.2 C8.1 C9.1 C10.1 F1.1 L1.2 R6.2 TP2.1 | length 170.1
  Bottom Layer w30: C8.1@9430,5425 9430,5422.35 9484.12,5368.23 C7.2@9575,5368.23
NetC11_1: C11.1 T2.4 | length 249.7
  Bottom Layer w30: T2.4@5891.38,3801.14 5892.74,3799.78 6138.64,3799.78 C11.1@6140,3798.43
NetC11_2: C11.2 Q2.3 Q3.3 R10.1 | length 1691.4
  Top Layer w30: Q2.3@6335,2130 Q2.3@6335,2145
  Bottom Layer w30: R10.1@6126.33,3391.89 6136.23,3381.99 6181.54,3381.99 6199.11,3364.42 6199.11,3182.74 6311.65,3070.21 6311.65,2484.57 6339.26,2456.95 6339.26,2435.74 Q3.3@6345,2430 6275,2360 6275,2197.58 6339.15,2133.43 Q2.3@6340,2133.43 ; R10.1@6130,3388.23 6129.02,3388.23 6098.22,3419.02 6098.22,3550.87 6140,3592.65 C11.2@6140,3601.57
NetC12_1: C12.1 D10.1 Q1.3 R9.2 T1.1 T2.5 TP3.1 VD3.2 | length 639.1
  Top Layer w15: TP3.1@5385,4010 5805,4010 v3(5910,4115)
  Top Layer w60: Q1.3@4989.13,4233.98 Q1.3@4996.02,4233.98
  Bottom Layer w15: T2.5@5390,3853.56 T2.5@5390,3860.2 ; v3(5910,4115) 5909.67,4115.33 5909.67,4171.44 R9.2@5910,4171.77
  other v1: 4870,4270 4889.86,4332 6435,4810 6395,4865
NetC12_2: C12.2 D4.1 SR1.1 SR2.1 SR3.1
  other v1: 5995,5205 5190,5230 5715,5230 4590,5250 5100,5260 5625,5260 6020,5275 5280,5295 5805,5295 6085,5295 4560,5320 4762.06,5320.15 5090,5325 5615,5325
NetC13_1: C13.1 D6.2 T1.14
  other v1: 7670,4155 7515,4195 7600,4210
NetC13_2: C13.2 R11.1
NetC15_2: C15.2 C18.1 D6.1 L2.1 R11.2 | length 144.3
  Bottom Layer w30: R11.2@8280,4430 8290,4440 R11.2@8290,4441.3 ; C18.1@8625,4282.8 8707.68,4282.8 8740,4250.47 C15.2@8740,4250
NetC21_1: C21.1 D12.1 T1.12
  other v1: 7666.59,3661.78 7670,3755
NetC21_2: C21.2 R15.2
NetC23_2: C23.2 D7.1 D15.1 D15.2 Q7.3 TP6.1 U1.1 U2.4 | length 1474.3
  Bottom Layer w18: D7.1@6925,1850 6925,1860.83 7022.44,1958.27 Q7.3@7080,1958.27 ; Q7.3@7083.73,1960.27 7086.9,1957.11 C23.2@7219.39,1957.11
  Bottom Layer w30: U1.1@6995,2205 7010,2190 7010,2158.67 7054.12,2114.55 7181.84,2114.55 ; TP6.1@7355,1755 7410,1810 U2.4@7410,1915 7367.89,1957.11 C23.2@7219.39,1957.11 7219.39,2076.99 7181.84,2114.55 ; D15.2@7410.63,2155.87 D15.1@7489.37,2155.87 ; D15.2@7410.63,2155.97 7302.82,2155.97 7261.41,2114.55 7181.84,2114.55
NetC24_1: C24.1 R8.2 TP8.1 U1.4 | length 464.2
  Bottom Layer w15: R8.2@6845,2285 6848.98,2288.98 C24.1@6848.98,2412.88 6897.67,2412.88 6984.79,2500 U1.4@6995,2500
  Bottom Layer w30: TP8.1@6994.48,2657.33 6994.74,2657.07 6994.74,2505.26 U1.4@6995,2505
NetC25_2: C25.2 D7.2 R8.1 R14.2 U1.8 | length 664.5
  Bottom Layer w15: U1.8@6686.39,2193.61 6686.39,2184.21 6650.19,2148.01 6650.19,1967.52 C25.2@6645.78,1963.11 6664.85,1944.04 6679.51,1944.04 6734.94,1888.6 6734.94,1887.62 6758.01,1864.55 6832.11,1864.55 6846.26,1850.4 D7.2@6846.26,1850 ; U1.8@6695,2195.96 U1.8@6695,2205 R8.1@6855,2205
NetC26_2: C26.2 D7.3 R14.1 | length 244.3
  Bottom Layer w15: R14.1@6755,1965 6873.52,1965 D7.3@6878.9,1965 ; C26.2@6852.66,2065 6852.66,2015.86 6871.48,1997.04 6871.48,1972.42 D7.3@6878.9,1965 ; D7.3@6885.63,1958.27 D7.3@6878.9,1965
NetC27_1: C27.1 R20.1 TP11.1 U1.3 | length 505.5
  Top Layer w30: U1.3@6995,2405 7121.51,2405 TP11.1@7246.82,2279.68
  Bottom Layer w30: U1.3@6995,2405 6996.77,2406.77 7088.23,2406.77 C27.1@7090,2408.54 R20.1@7090,2303.23
NetC28_1: C28.1 Q4.3 R17.2 R20.2 R22.1 T2.9 VD5.2 | length 4631
  Top Layer w40: 5771.68,926.34 6051.34,926.34 6793.67,1668.67 7177.27,1668.67 7285.97,1777.37 7285.97,2079.03 v1(7155,2210)
  Bottom Layer w40: R20.2@7090,2206.77 7093.23,2210 v1(7155,2210)
  Bottom Layer w60: VD5.2@5297.6,3037.53 5480.04,3219.96 5509.74,3219.96 5520.04,3219.96 5620.82,3119.18 5620.82,2960.12 5690,2890.94 R17.2@5690,2888.23 ; VD5.2@5298.72,3038.35 5210,2949.63 5210,2820 5422.2,2607.8 Q4.3@5422.2,1925 ; T2.9@5415,3435 5415.57,3434.43 5474.6,3434.43 5509.74,3399.28 5509.74,3249.67 5500.04,3239.96
NetC28_2: C28.2 D11.1 SR4.1 SR5.1 SR6.1
NetC29_2: C29.2 C31.2 D12.2 L3.1 R15.1 | length 120.9
  Bottom Layer w30: C29.2@8650,3488.41 8732.68,3488.41 8759.02,3514.74 C31.2@8760,3514.74
NetC38_1: C38.1 C42.1 C50.2 D14.1 L4.1 R25.1 R26.1 R29.1 R31.1 TP16.1 | length 1598.8
  Bottom Layer w40: R26.1@7970,1806.46 7971.61,1804.84 8113.39,1804.84 C50.2@8115,1803.23 8278.5,1803.23 8301.94,1826.66 8301.94,1981.45 8278.5,2004.88 8239.91,2004.88 R31.1@8233.33,2011.46 ; R31.1@8235,2032.77 R29.1@8235,2114.82 ; R29.1@8235,2116.77 R29.1@8235,2114.82 ; TP16.1@8330,2107.2 8322.38,2114.82 R29.1@8235,2114.82 ; TP16.1@8340.28,2112.87 8572.41,2345 8738.43,2345 C42.1@8840,2446.57 8836.17,2450.4 8828.05,2450.4 8775.06,2503.4 8668.4,2503.4 C38.1@8665,2500
  other v1: 8403.42,2450.4 8446.21,2496.94 8438.7,2557.75 8277.31,2587.02
NetC47_1: C47.1 C49.2 D14.2 T1.10
  other v1: 8062.48,2410.99 8138.02,2427.59 8018.48,2578.68 8145,2610 8074.93,2620.19 7565,3195 7500,3215 7650,3215
NetC47_2: C47.2 R25.2
NetC48_2: C48.2 C49.1
NetC51_1: C51.1 R36.2 | length 165
  Bottom Layer w15: C51.1@8025,2116.77 8063.23,2116.77 8115,2065 R36.2@8115,2011.46
NetC51_2: C51.2 R29.2 U2.2 U4.2 | length 766.7
  Bottom Layer w15: U2.2@7739.44,2023.94 7751.29,2035.79 7751.29,2188.71 7777.57,2215 8025,2215 8233.23,2215 R29.2@8235,2213.23 ; U2.2@7744.65,2015 7750.3,2020.66 7840.2,2020.66 U4.2@7842.87,2023.33
NetC53_2: C53.2 R34.2 R44.1 U3.1 | length 3310.9
  Top Layer w30: R34.2@5086.93,3597.36 5086.93,3590.58 4952.48,3456.13 4952.48,3202.52 5020,3135 5685,3135 5739.1,3080.9 v1(5912.56,3080.9)
  Bottom Layer w30: v1(5912.56,3080.9) 5914.47,3078.99 5914.47,3071.91 5914.54,3071.85 5914.54,2927.68 5972.2,2870.02 6088.33,2870.02 6211.85,2746.49 6211.85,1825.15 6293.73,1743.27 6338.5,1743.27 6345,1736.77 6345,1686.26 R44.1@6345,1630 6353.33,1630 6357.56,1634.23 6396.55,1634.23 6438.98,1676.65 6438.98,1679.61 U3.1@6445.63,1686.26
NetC54_2: C54.2 Q5.3 Q8.1 R35.2 R42.1 | length 756
  Bottom Layer w30: Q5.3@7564.74,2514.8 7621.86,2514.8 7716.54,2420.12 7727.71,2420.12 7740,2407.83 7818.3,2407.83 ; Q8.1@7660.45,2156.47 7660.45,2167.3 7667.1,2173.96 7820,2326.85 7820,2408.54 C54.2@7850,2408.54 R42.1@7960,2408.54
NetC55_2: C55.2 Q10.1 R48.1 VD7.2 | length 793.3
  Bottom Layer w40: VD7.2@7490,1111.73 7581.73,1111.73 C55.2@7700,1230 ; C55.2@7710,1236.57 7710.89,1237.46 7844.11,1237.46 R48.1@7845,1236.58 ; R48.1@7845.98,1236.58 7845.98,1138.43 7869.42,1115 8062.2,1115 8085.63,1138.43 8085.63,1179.13 8086.14,1178.62
NetC56_2: C56.2 R43.2 R50.1 U5.2 U6.1 | length 546.8
  Bottom Layer w30: R50.1@6725,1376.77 R43.2@6980,1376.77 6980.98,1376.77 7012.72,1345.04 7012.72,1292.91 U5.2@7019.37,1286.26 ; U5.2@7025,1281.65 U5.2@7026.02,1280.63
  Bottom Layer w40: R43.2@6980.98,1376.77 7122.7,1376.77 7146.02,1400.1 7148.98,1400.1 7150.63,1401.75 U6.1@7150.63,1404.7
NetC57_2: C57.2 R47.2 R49.1 U5.1 | length 489.3
  Bottom Layer w30: C57.2@6725,1108.23 R49.1@6852.5,1108.23 ; U5.1@6940.63,1286.26 6940.63,1283.31 6854.39,1197.07 6854.39,1109.14 6865.06,1109.14 R47.2@6979.09,1109.14 ; R47.2@6974.37,1113.86 R47.2@6980,1108.23 6991.77,1108.23 R47.2@6995,1105
NetC58_2: C58.2 C61.1
NetC59_2: C59.2 C64.1 R51.1 R52.2
  other v1: 2705,4725 2735,4800 2695,4850
NetC60_1: C60.1 L5.4 SR7.2 SR8.2 SR9.2 | length 7.6
  Top Layer w90: L5.4@2265.53,3630.04 L5.4@2270.91,3635.42
  other v1: 2175,3605 1894.47,3627.52 2083.84,3631.06 2185,3680 1945.21,3704.21 2031.92,3704.21 2240,3730 2310,3735 1483.28,4108.45 1478.87,4169.45 1436.97,4218.7 1373.22,4220.61 1399.72,4542.56 1459.72,4567.56 1479.72,4647.56 1429.72,4702.56 1363.17,5033.22 1424.18,5037.63 1473.42,5079.53 1475.33,5143.28
NetC60_2: C60.2 C69.1
  other v1: 1197.73,3044.34 1193,3108.51 1085,3145 1145,3145 1085.4,3546.43 1155.59,3553.75 1210.51,3587.93 1223.33,3646.52
NetC62_2: C62.2 C63.1 | length 13.4
  Bottom Layer w40: C63.1@7792.03,693.43 C63.1@7805.45,693.43
NetC64_2: C64.2 C71.1 R52.1 R55.1
  other v1: 2785,1935 3470,1950 2760,2015 3474.23,2032.43 2680,2040 3527.82,2103.15 3687.13,2136.02 3604.26,2143.16 3620,3060 3705,3065 3550,3070 3505,3150 3505,3230
NetC65_2: C65.2 C72.1
NetC69_2: C69.2 L5.1 SR10.2 SR11.2 SR12.2
  other v1: 1480,1535 1470,1595 1365,1625 1425.85,1629.67 1380,1945 1445.1,1956.06 1470,2025 1456.18,2082.66 1388.3,2104.81 1380,2423.73 1445.1,2434.79 1470,2503.73 1456.18,2561.4 1388.3,2583.54 1951.42,2991.46 2015.28,2993.73 2080.38,3004.79 1883.55,3013.6 2268.8,3040.44 1869.72,3071.27 2105.28,3073.73 2200.01,3075.43 2091.45,3131.4 1894.62,3140.21 2171.54,3143.04 1959.72,3151.27 2023.58,3153.54 2212.46,3215.39 2284.22,3234.37
NetD1_2: D1.2 R3.2
NetD3_2: D3.2 D11.2 Q4.2 SR4.2 SR5.2 SR6.2 T1.5 TP10.1
  other v1: 5115,2030 5180,2035 4766.39,2464.74 5095,2485 4766.39,2551.31 5109.38,2555.96 5195,2570 4723.98,2605.35 4797.61,2826.81 4862.15,2837.44 4750,2880 6465.53,4013.16 6543.96,4020.11 6580,4085 6565.04,4153.26
NetD5_1: D5.1 D5.2 Q1.1 R7.2 R9.1 VD2.2 | length 1012.1
  Bottom Layer w30: Q1.1@5422.2,4263.98 5434.29,4263.98 5541.25,4370.95 5613.19,4370.95 ; 5613.03,4371.1 R7.2@5735,4371.1 5732.5,4368.6 5732.5,4264.59 5730,4262.09 D5.2@5730,4190 ; D5.1@5712.52,4275.39 5719.17,4268.74 D5.1@5730,4268.74 ; D5.1@5735.14,4267.23 5894,4267.23 R9.1@5905,4278.23 ; R9.1@5911.34,4269.57 6074.57,4269.57 VD2.2@6155,4350
NetD5_3: D5.3 R5.2 | length 173.7
  Bottom Layer w30: R5.2@5611.1,4065 5616.42,4070.31 5616.42,4231.42 D5.3@5620,4235
NetD8_1: D8.1 D8.2 Q4.1 R16.2 R17.1 VD4.2 | length 2637.3
  Bottom Layer w30: Q4.1@4989.13,1925 4989.13,1756.56 5076.15,1669.54 5430.75,1669.54 5535.23,1774.02 5535.23,2652.9 ; VD4.2@5298.72,2878.35 5524.17,2652.9 ; 5535.23,2650.1 5665.33,2780.2 5678.42,2780.2 R17.1@5690,2791.77 5690.45,2791.32 5770,2791.32 ; R16.2@5730,3011.1 5731.97,3011.1 5746.5,2996.57 5746.5,2994.61 5770,2971.1 5770,2791.32 ; D8.1@5884.37,2790.87 5883.92,2791.32 5770,2791.32
NetD8_3: D8.3 R13.2 | length 112
  Bottom Layer w30: D8.3@5845,2899.13 R13.2@5845,3011.1
NetD9_3: D9.3 R10.2 | length 119.6
  Bottom Layer w30: D9.3@6126.26,3174.14 6125.82,3174.59 6125.82,3287.59 R10.2@6130,3291.77
NetD13_1: D13.1 R18.2 R21.2 R23.2 | length 395.4
  Bottom Layer w30: R18.2@6805,2920 6935,2920 7055,2920 7055,3021.07 7030,3046.07 D13.1@7030,3055
NetD13_2: D13.2 T1.8
  other v1: 6570,3445 6580,3545
NetD15_3: D15.3 Q5.1 Q8.3 R33.2 | length 464.7
  Bottom Layer w30: R33.2@7410,2408.54 7410,2398.86 7411.89,2396.97 7411.89,2313.07 7454.42,2270.54 7454.42,2268.56 7617.26,2268.56 7617.26,2279.38 7604.11,2292.53 Q5.1@7604.11,2406.54
NetD16_1: D16.1 F2.3 F2.4
  other v1: 2674.03,5622.87 2670,5705 2611.2,5755.23 2540,5760 2189.27,6089.65 2571.16,6089.65 2126.3,6106.51 2508.19,6106.51 2245.8,6112.95 2627.69,6112.95 2103.49,6167.99 2485.38,6167.99 2259.68,6175.43 2641.57,6175.43 2103.49,6232.45 2485.38,6232.45 2255,6235 2636.89,6235 2123.82,6298.89 2505.71,6298.89 2250.76,6302.36 2632.65,6302.36 2184.31,6315.26 2566.2,6315.26
NetD16_2: D16.2 D17.1
  other v1: 1995,5555 1915,5560 1528.53,5564.63 1606.33,5566.7 1659.11,5609.21 1880,5625 1665.55,5690 1885,5695
NetD17_2: D17.2 D18.2 D19.2 SR7.1 SR8.1 SR9.1 | length 8.7
  Top Layer w90: D18.2@750,5300.28 D18.2@758.12,5300.28 ; SR7.1@1190,4135 SR7.1@1190,4135.61
  other v1: 1105,4113.5 1106.91,4177.25 1156.15,4219.15 1217.16,4223.56 1155,4549.55 1105,4604.55 1125,4684.55 1185,4709.55 1155,5040 1105,5095 1125,5175 430,5200 1185,5200 695,5215 790,5215 335,5250 515,5265 655,5275 850,5275 320,5335 645,5350 850,5350 505,5360 960,5570 1040,5580 1070,5635 1075,5690
NetD18_1: D18.1 D20.2 | length 5.3
  Top Layer w90: D18.1@750,4709.72 D18.1@750,4715
  other v1: 660,4440 840,4445 665,4505 835,4510 710,4550 780,4550 730,4620 810,4635 665,4660 840,4710 665,4740
NetD19_1: D19.1 D21.2 | length 14.1
  Top Layer w90: D21.2@405,4465 D21.2@415,4475
  other v1: 325,4440 505,4445 330,4505 500,4510 375,4550 445,4550 395,4620 475,4635 330,4660 505,4710 330,4740
NetD20_1: D20.1 D23.2 F3.2
  other v1: 855,2710 850,2780 800,2845 725,2860 735,3775 825,3795 660,3820 655,3890 855,3890
NetD21_1: D21.1 D24.2 J6.3
  other v1: 315.3,2696.36 309.63,2772.73 345,2825 417,2857.79 345,3400 350.03,3461.77 377,3512.05 425,3545 435,3775 355,3790 310,3845 300,3910
NetD23_1: D23.1 D25.2 | length 5.3
  Top Layer w90: D25.2@750,1915 D25.2@750,1920.28
  other v1: 660,1889.72 840,1894.72 665,1954.72 835,1959.72 710,1999.72 780,1999.72 730,2069.72 810,2084.72 665,2109.72 840,2159.72 665,2189.72
NetD24_1: D24.1 D26.2 | length 5.3
  Top Layer w90: D26.2@415,1915 D26.2@415,1920.28
  other v1: 325,1892.36 505,1897.36 330,1957.36 500,1962.36 375,2002.36 445,2002.36 395,2072.36 475,2087.36 330,2112.36 505,2162.36 330,2192.36